# EAGLE board newDCDCmirror (EAGLE 9.0.1)
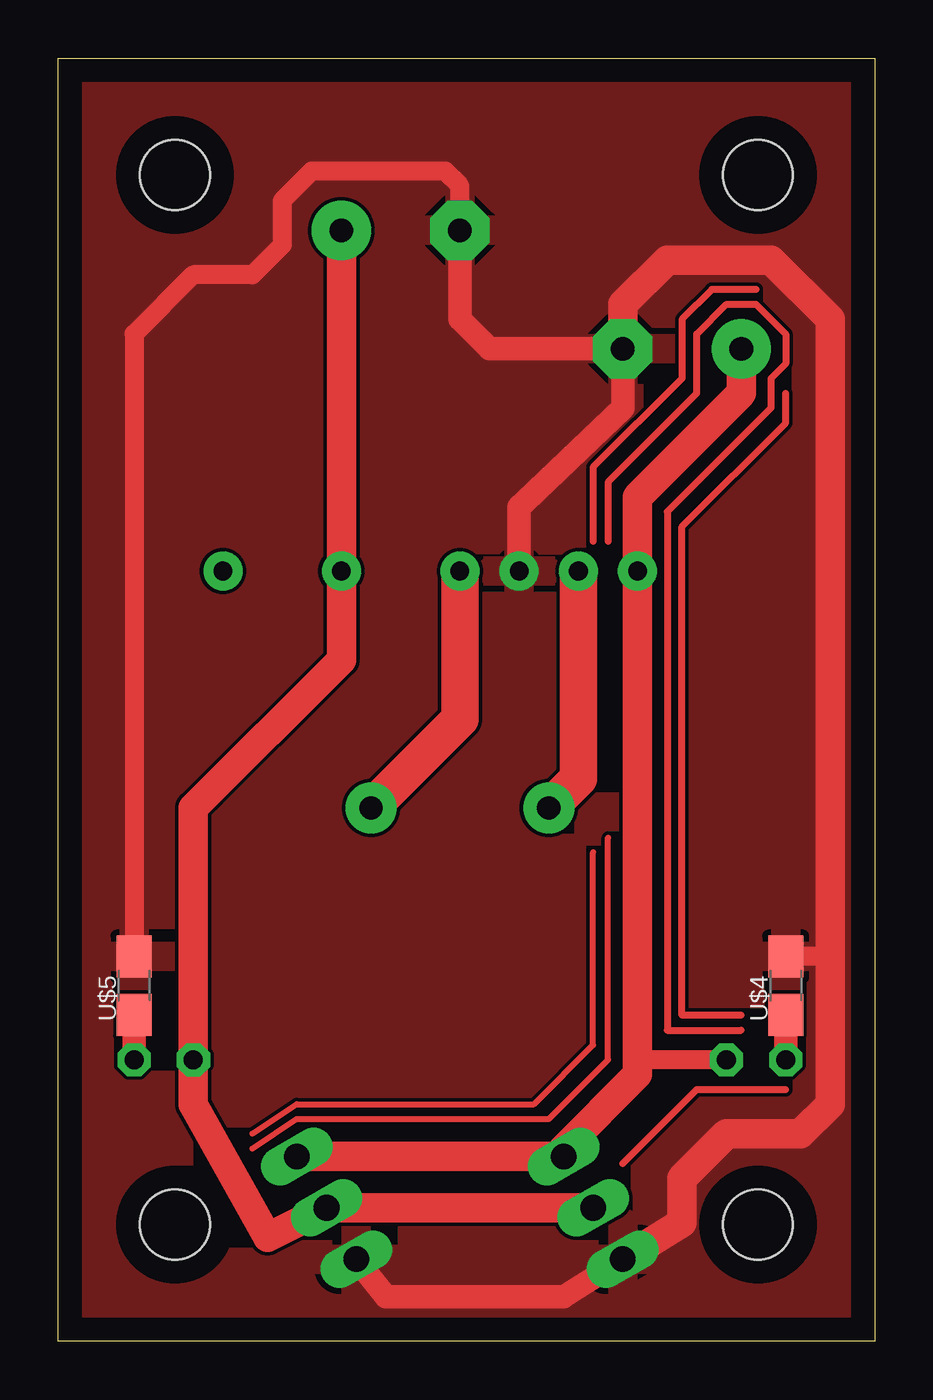
[diagram p0: board, top side]
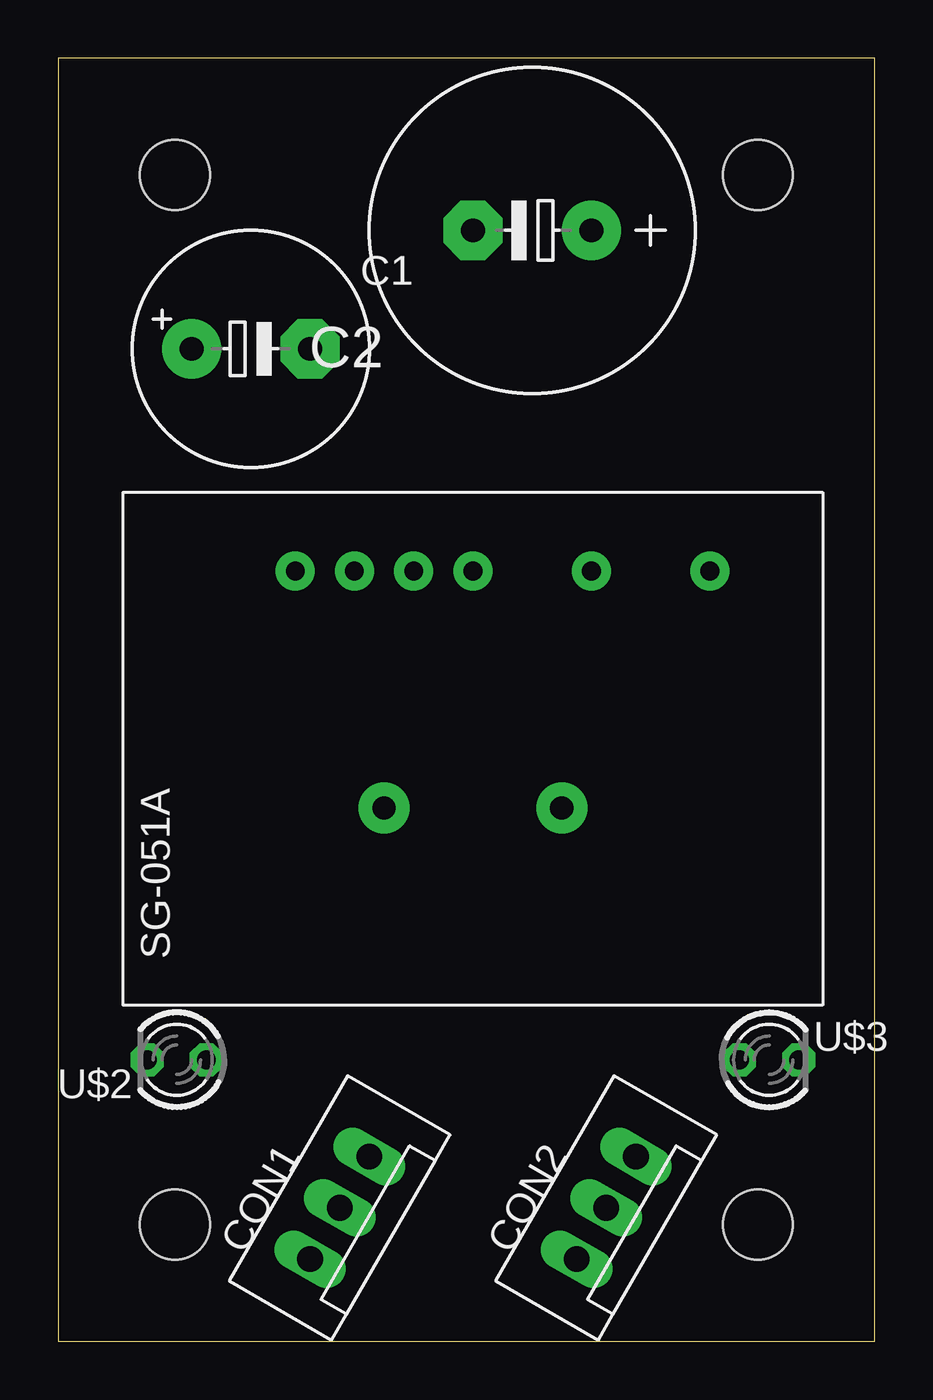
[diagram p1: board, bottom side, seen from below]

Size 35 x 55 mm. Coordinates in mm from the lower left corner, seen from the top.
Outline: 35,0 0,0 0,55 35,55 35,0
Copper layers (1*16): Top 0.035mm / dielectric 1.5mm / Bottom 0.035mm
Design rules "default": minimum track width 6mil, minimum drill 0.35mm, track to track 6mil, track to pad 6mil, pad to pad 6mil, via to via 6mil, smd to smd 6mil, copper to edge 40mil, drill to drill 6mil, minimum pad ring 10mil, minimum via ring 8mil, stop-mask expansion 4mil, vias tented up to drill 0mil, thermal gap 10mil
Holes 3 mm at 30,5 5,5 30,50 5,50

## Footprints (pad centres in the part's own frame; a part is rotated, then mirrored left to right if it is on the bottom)
D=2,φ=10,5 = drill 1.016 pad 2.54: + -2.54,0 | drill 1.016 pad 2.54 octagon: - 2.54,0
D=2,φ=13 = drill 1.016 pad 2.54: + -2.54,0 | drill 1.016 pad 2.54 octagon: - 2.54,0
CON3 = drill 1.1 long: P$1 2.54,0; P$2 0,0; P$3 -2.54,0
SG-051A = drill 0.8 pad 1.676: P$1 7.62,7.62; P$2 7.62,5.08; P$3 7.62,2.54; P$4 7.62,0; P$5 7.62,-5.08; P$6 7.62,-10.16 | drill 1 pad 2.184: P$7 -2.54,-3.81; P$8 -2.54,3.81
LED3MM = drill 0.813 pad 1.422 octagon: A -1.27,0; K 1.27,0
0805 = smd 1.8 x 1.5: 1 -1.25,0; 2 1.25,0

## Placement (x,y rotation side)
C1  50V470uF  [D=2,φ=10,5]  26.75,42.55 0 bottom
C2  35V1000uF  [D=2,φ=13]  14.68,47.62 180 bottom
CON1  CON3  [CON3]  22.93,5.71 60 bottom
CON2  CON3  [CON3]  11.51,5.71 60 bottom
U$1  SG-051A  [SG-051A]  17.22,25.4 90 bottom
U$2  LED(砲弾型)3  [LED3MM]  29.92,12.06 180 bottom
U$3  LED(砲弾型)3  [LED3MM]  4.52,12.06 0 bottom
U$4  4.7k  [0805]  31.19,15.24 90 top
U$5  1k  [0805]  3.25,15.24 90 top

## Library data of the parts
C1 C2 = (Foundation)電解コンデンサ
CON1 CON2 = (コネクタ)XH
U$1 = (DC降圧)SG-051A
U$2 U$3 = (半導体)LED
U$4 U$5 = (Foundation)表面実装RC

## Nets
+5V: C2.+ CON1.P$2 CON2.P$2 U$1.P$5 U$3.A
+24V: C1.+ CON1.P$1 CON2.P$1 U$1.P$1 U$2.A
GND: C1.- C2.- CON1.P$3 CON2.P$3 U$1.P$3 U$4.2 U$5.2
N$4: U$1.P$4 U$1.P$7
N$5: U$1.P$2 U$1.P$8
N$9: U$2.K U$4.1
N$10: U$3.K U$5.1

## Tracks (layer width: path | path; a pad name or v marks a point on that pad's centre or on a via)
+5V
  Top 1.27: C2.+ U$1.P$5 12.14,29.21 5.79,22.86 U$3.A 5.79,10.16 8.96,4.45 CON2.P$2 CON1.P$2
+24V
  Top 0.813: U$2.A 24.84,12.06
  Top 1.27: CON2.P$1 CON1.P$1 21.66,8.26 24.84,11.43 24.84,12.06 U$1.P$1 24.84,36.2 29.29,40.64 C1.+
GND
  Top 0.813: C2.- 17.22,49.53 16.59,50.16 10.87,50.16 9.6,48.9 9.6,46.99 8.33,45.72 5.79,45.72 3.25,43.18 U$5.2 | U$4.2 31.21,16.51 33.09,16.51
  Top 1.016: U$1.P$3 19.76,35.76 20,36 24.21,40.01 C1.- 18.49,42.55 17.22,43.81 C2.- | CON1.P$3 21.66,1.91 14.04,1.91 CON2.P$3
  Top 1.27: CON1.P$3 26.75,5.08 26.75,6.99 28.65,8.89 31.83,8.89 33.09,10.16 33.09,16.51 33.09,43.81 30.55,46.35 26.11,46.35 24.21,44.45 C1.-
  pour Top: 35,55 0,55 0,0 35,0
N$1
  Top 0.305: 24.21,7.62 27.38,10.79 31.19,10.79
N$2
  Top 0.305: 29.29,13.34 26.11,13.34 26.11,35.56 30.55,40.01 30.55,41.27 31.19,41.91 31.19,43.18 29.92,44.45 28.65,44.45 27.38,43.18 27.38,40.64 23.57,36.83 23.57,34.29
N$3
  Top 0.305: 29.29,13.97 26.75,13.97 26.75,34.92 31.19,39.37 31.19,40.64
N$4
  Top 1.6: U$1.P$7 17.22,26.67 U$1.P$4
N$5
  Top 1.6: U$1.P$8 22.3,24.13 U$1.P$2
N$6
  Top 0.254: 23.57,21.59 23.57,12.06 21.03,9.53 10.23,9.53 8.33,8.26
N$7
  Top 0.305: 29.92,45.09 28.02,45.09 26.75,43.81 26.75,41.27 22.93,37.47 22.93,34.29
N$8
  Top 0.254: 22.93,20.95 22.93,12.7 20.39,10.16 10.23,10.16 8.33,8.89
N$9
  Top 1.016: U$4.1 U$2.K
N$10
  Top 1.016: U$5.1 U$3.K